# Altium PCB RGB_driver_AC.PcbDoc
Units mm, origin at the board's own origin, x right, y up, seen from the top; angles counter-clockwise.
Board outline 90.73 x 49.91 mm, 2 copper layers (Top Layer, Bottom Layer); 57 components, 39 nets, 162 pads, 7 vias.
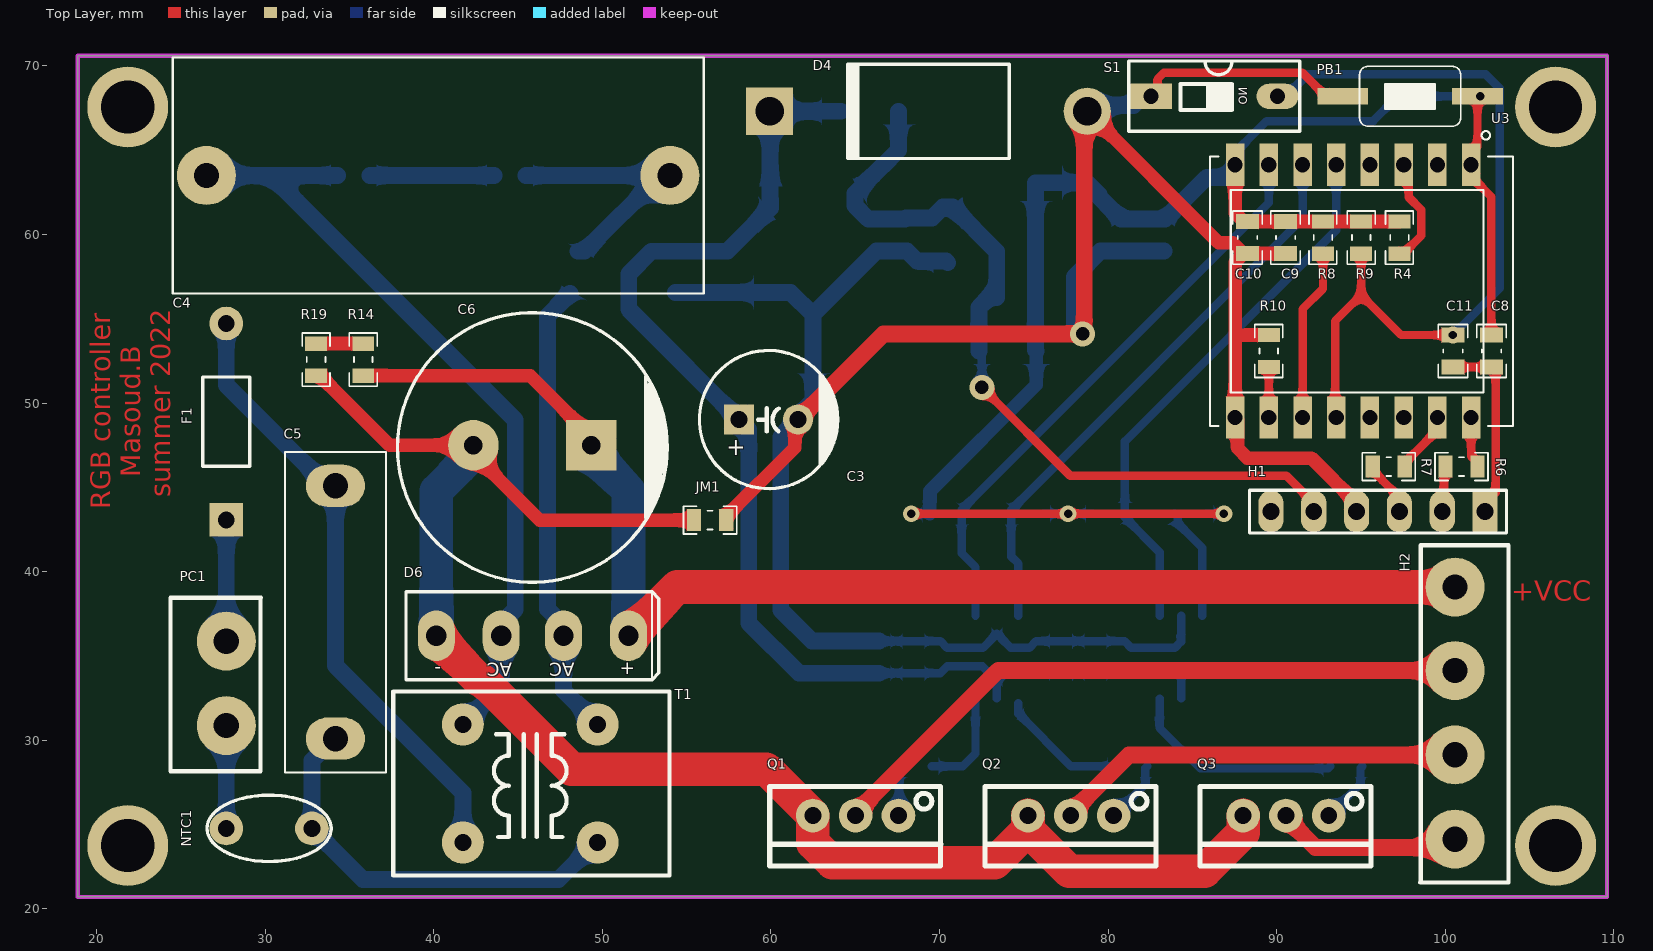
[diagram p0: Top Layer view]
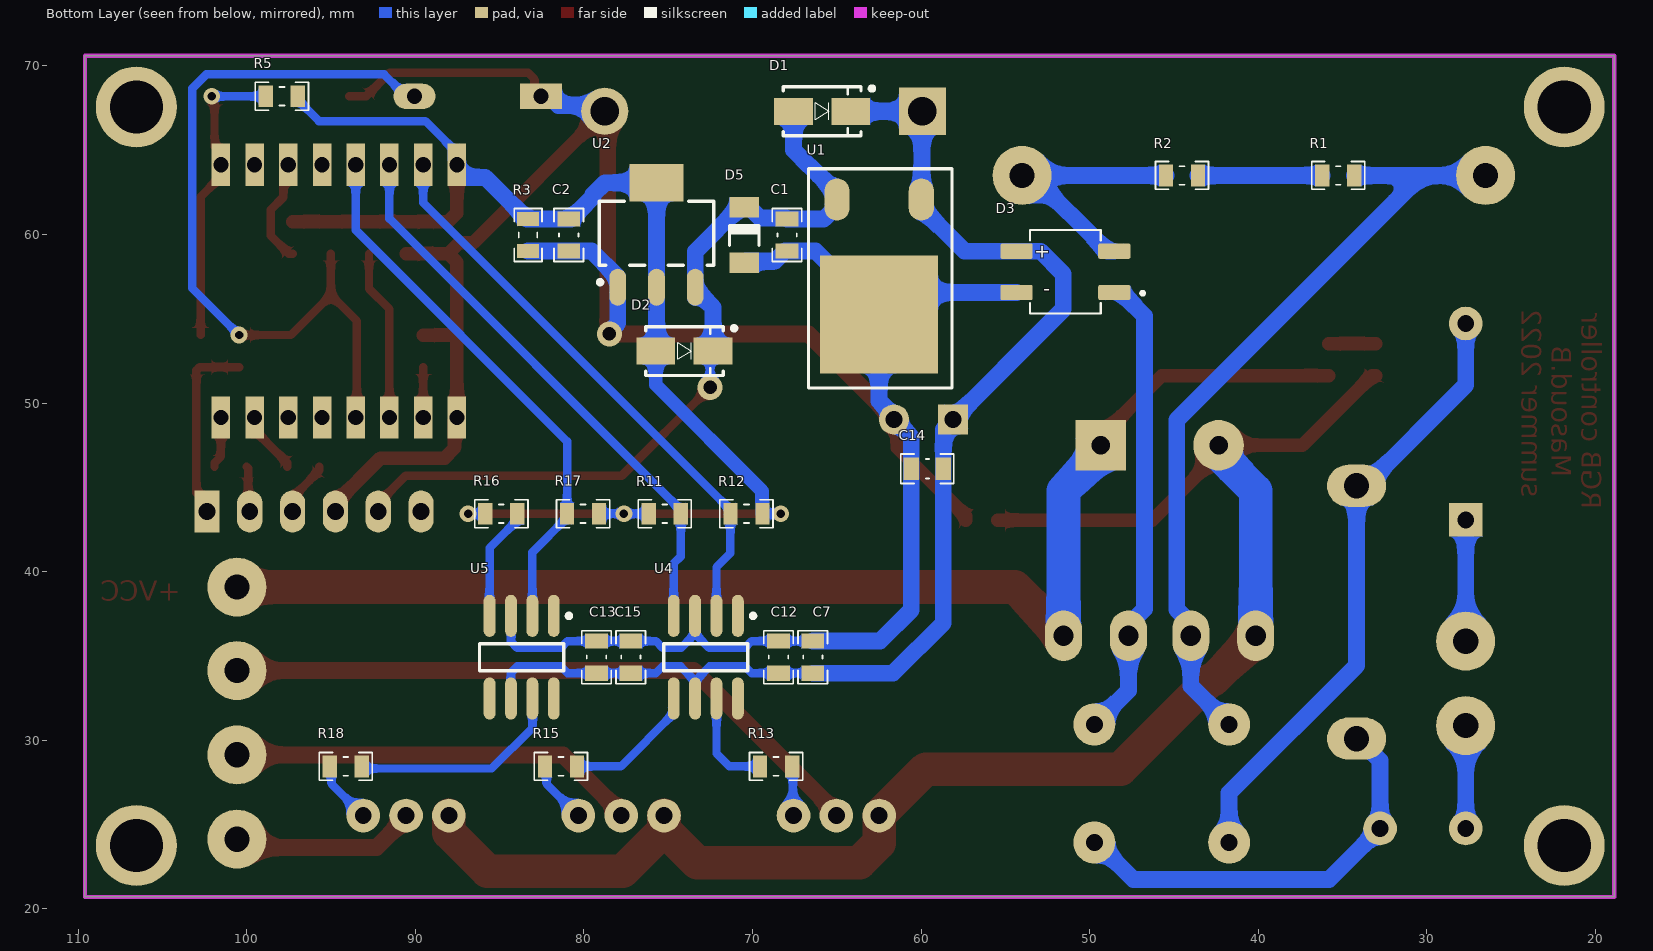
[diagram p1: Bottom Layer view, seen from below]
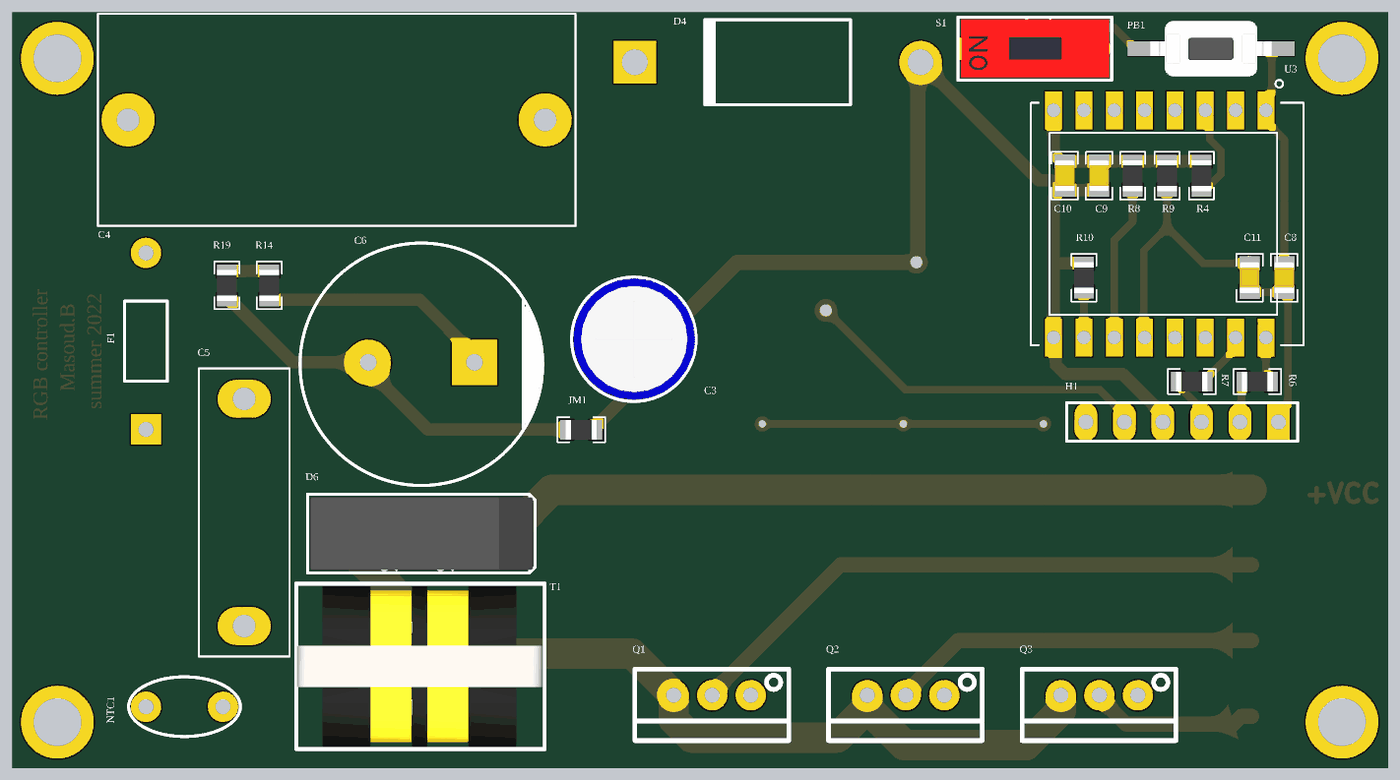
[diagram p2: 3D render of the assembled board from above, using the file's embedded part models]
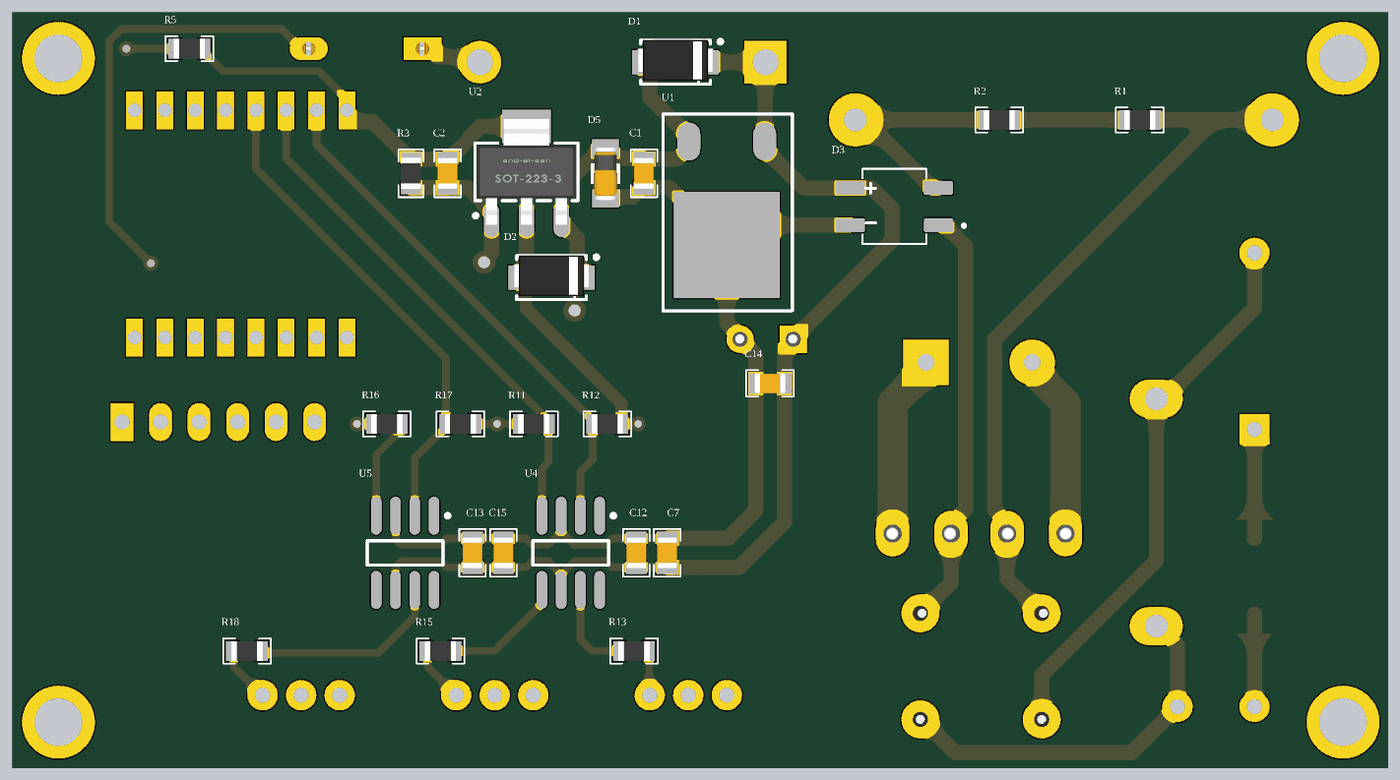
[diagram p3: 3D render of the assembled board from below, using the file's embedded part models]

## Layer stack, top to bottom
Top Solder: solder mask 0.0102, Solder Resist, Dk 3.5
Top Layer: signal copper 0.0356
Dielectric 1: dielectric 0.32, FR-4, Dk 4.8
Bottom Layer: signal copper 0.0356
Bottom Solder: solder mask 0.0102, Solder Resist, Dk 3.5

## Board outline
18.867,20.701 18.867,70.612 109.601,70.612 109.601,20.701

## Design rules (kind name [scope] priority, off if disabled: settings)
Clearance [All] p1: gap=0.4 ignorepadtopadclearanceinfootprint=TRUE except(0: Arc-Hole Track-Hole SMDPad-Hole THPad-Hole Via-Hole Fill-Hole Poly-Hole Region-Hole Text-Hole)
Height [All] p1 off: minheight=0 maxheight=25.4 prefheight=12.7
PolygonConnect [All] p1: connectstyle=Relief reliefconductorwidth=0.254 reliefentries=4 polygonreliefangle="90 Angle" airgapwidth=0.254
RoomDefinition power [InComponentClass('power')] p1 off: confinementstyle=ConfineIn formatcopy=TRUE lockcomponents=FALSE outline 178.943,71.247 345.186,71.247 345.186,93.853 178.943,93.853
RoomDefinition micro [InComponentClass('micro')] p2 off: confinementstyle=ConfineIn formatcopy=TRUE lockcomponents=FALSE outline 226.761,109.728 324.043,109.728 324.043,138.176 226.761,138.176
RoomDefinition driver [InComponentClass('driver')] p3 off: confinementstyle=ConfineIn formatcopy=TRUE lockcomponents=FALSE outline 210.124,38.1 303.088,38.1 303.088,51.435 210.124,51.435
RoutingVias [All] p1: holewidth=0.7 width=1.2 viastyle="Through Hole" minholewidth=0.5 minwidth=1 maxholewidth=1 maxwidth=1.5
SolderMaskExpansion [All] p1: expansion=0.102 istentingtop=FALSE
Width [All] p1: maxlimit=2 minlimit=0.3 preferedwidth=0.3
29 further rules are at their usual default settings.

## Classes and differential pairs
component class power: C1 C2 C3 C4 C5 C6 C14 D1 D2 D3 D4 D5 D6 F1 JM1 NTC1 PC1 R1 R2 R3 R14 R19 T1 U1 U2
component class micro: C8 C9 C10 C11 H1 PB1 R4 R5 R6 R7 R8 R9 R10 S1 U3
component class driver: C7 C12 C13 C15 H2 H-1 Q1 Q2 Q3 R11 R12 R13 R15 R16 R17 R18 U4 U5

## Components (designator, comment, footprint, x,y, rotation, side; value= is the part's Value field where it differs from the comment)
C1 "cap 10uF" CAP0805 67.945,59.971 r270 bottom value=10uF
C2 "cap 10uF" CAP0805 80.899,59.971 r270 bottom value=10uF
C3 "cap 47uF 25V" "Cap electrolitic radial 8x11.5-3.5" 58.105,49.022 r180 top value=47uF
C4 "cap 3.3uF" CAPRR2750W80L3150T1400H2450 40.259,63.5 r0 top value=3.3uF
C5 "cap 220nF" MKT-15mm 34.163,37.592 r90 top value=220nF
C6 "cap 47uF" Cap-Polar-16MM 45.847,47.371 r180 top value=47uF
C7 "cap 10uF" CAP0805 66.421,34.925 r90 bottom value=10uF
C8 "cap 100nF" CAP0805 102.743,53.086 r270 top value=100nF
C9 "cap 100nF" CAP0805 90.532,59.817 r90 top value=100nF
C10 "cap 1uF" CAP0805 88.265,59.817 r270 top value=1uF
C11 "cap 1uF" CAP0805 100.457,53.086 r270 top value=1uF
C12 "cap 10uF" CAP0805 68.453,34.925 r90 bottom value=10uF
C13 "cap 100nF" CAP0805 79.248,34.925 r90 bottom value=100nF
C14 "cap 100nF" CAP0805 59.629,46.101 r0 bottom value=100nF
C15 "cap 100nF" CAP0805 77.216,34.925 r90 bottom value=100nF
D1 "uf4007" DIOM4629X24N 65.864,67.31 r180 bottom
D2 "uf4007" DIOM4629X24N 74.041,53.086 r180 bottom
D3 "MB6S" SOIC245P670X270-4N 51.435,57.785 r0 bottom
D4 "12V" DO-201AD 69.342,67.31 r180 top
D5 "5.1V" "Diode 1n4148 SMD" 70.485,58.321 r90 bottom
D6 "KBP410" "Bridge KBP PACKAGE" 45.847,36.195 r180 top
F1 "1A" PIN-W2/E2.8 27.686,48.895 r90 top
H1 "H-1x6" H-1x6 95.885,43.561 r180 top
H2 "Phonix 4" "PHOENIX TERMINAL R 4" 120.523,21.557 r90 top
JM1 "Short Jumper" RES0805 56.388,43.053 r0 top
NTC1 "NTC 10d9" CAPNTO5.08-7.37x3.94 30.226,24.765 r180 top
PB1 "Push-Button-tall" tack-sw-3x5x6 97.917,68.199 r0 top
PC1 "Power Connector" "phoenix terminal R 2" 7.747,38.443 r270 top
Q1 "FQPF2N60C" TO-220 65.024,25.527 r180 top
Q2 "FQPF2N60C" TO-220 77.787,25.527 r180 top
Q3 "FQPF2N60C" TO-220 90.551,25.527 r180 top
R1 "Res 330k" RES0805 35.254,63.5 r0 bottom value=330k
R2 "Res 330k" RES0805 44.518,63.5 r0 bottom value=330k
R3 "Res 330R" RES0805 83.312,59.971 r90 bottom value=330R
R4 "Res 10K" RES0805 97.282,59.817 r90 top value=10K
R5 "Res 10K" RES0805 97.917,68.199 r180 bottom value=10K
R6 "Res 10R" RES0805 100.965,46.228 r180 top value=10R
R7 "Res 10R" RES0805 96.647,46.228 r0 top value=10R
R8 "Res 10K" RES0805 92.748,59.817 r270 top value=10K
R9 "Res 10K" RES0805 95.015,59.817 r270 top value=10K
R10 "Res 10K" RES0805 89.535,53.086 r270 top value=10K
R11 "Res 10K" RES0805 75.204,43.434 r0 bottom value=10K
R12 "Res 10K" RES0805 70.358,43.434 r0 bottom value=10K
R13 "Res 10R" RES0805 68.599,28.448 r0 bottom value=10R
R14 "Res 330k" RES0805 35.814,52.578 r270 top value=330k
R15 "Res 10R" RES0805 81.362,28.448 r180 bottom value=10R
R16 "Res 10K" RES0805 84.897,43.434 r0 bottom value=10K
R17 "Res 10K" RES0805 80.051,43.434 r180 bottom value=10K
R18 "Res 10R" RES0805 94.126,28.448 r180 bottom value=10R
R19 "Res 330k" RES0805 33.02,52.578 r90 top value=330k
S1 "DS1" "DIP Switch x1" 82.55,68.199 r270 top
T1 "UUD9-EMI filter" UUD9.8 45.72,27.432 r180 top
U1 "L7805CV" REG-7805-smd 62.484,62.07 r0 bottom
U2 "AMS1117-3.3" SOT223 75.692,60.071 r90 bottom
U3 "ESP8266-12E/ESP-12E" ESP8266-12E-THT 101.536,64.135 r270 top locked
U4 "7667" SO8_M 72.771,34.925 r270 bottom
U5 "7667" SO8_M 83.693,34.925 r270 bottom

## Footprints (in the part's own frame and the unit in brackets; to place one, negate y for a bottom-side part, rotate by r counter-clockwise, add the part's x,y. Pads: shape width x height; smd on the part's side, far side on the other; paste and mask are expansions set on the pad)
"Bridge KBP PACKAGE" [mm] "KBP Bridge Rectifiers DESIGNER :ABBAS BASEREH"
  oval 2.2x3 hole 1.2: 1(-5.7,0) 2(-1.85,0) 3(1.85,0) 4(5.7,0)
  silkscreen extent -7.5,-2.6 7.5,2.6, body extent -7.38,-2.42 7.35,2.41, height 12.49
CAP0805 [mm] "Chip Capacitor, 2-Leads, Body 2/00x1/25mm, IPC Medium Density DESIGNER:ABBAS BASEREH"
  rect 0.9x1.35 smd: 1(-0.95,0) 2(0.95,0)
  silkscreen extent -1.58,-0.87 1.58,0.87, body extent -1.02,-0.65 1.02,0.65, height 0.5
"Cap electrolitic radial 8x11.5-3.5" [mm] "Cap electrolitic radial 8x11.5-3.5-Design:Ali Hafizi"
  rect 1.8x1.8 hole 1: 1(0,0)
  round 1.8 hole 1: 2(-3.5,0)
  silkscreen extent -5.85,-4.1 2.35,4.1, body extent -5.8,-4.04 2.25,4.01, height 12.03
Cap-Polar-16MM [mm]
  rect 3x3 hole 1.1: 1(-3.5,-0.127)
  round 3 hole 1.1: 2(3.5,-0.127)
  silkscreen extent -8,-8 8,8
CAPNTO5.08-7.37x3.94 [mm] "Capacitor, Radial, Tantalum, Non-Polarised; Body 7.37 x 3.94 x 6.86 mm (WxTxH max); Pin Spacing 5.08 mm (typ)"
  round 2 hole 1: 1(-2.54,0) 2(2.54,0)
  silkscreen extent -3.68,-1.98 3.68,1.96
CAPRR2750W80L3150T1400H2450 [mm]
  round 3.5 hole 1.5: 1(-13.75,0) 2(13.75,0)
  silkscreen extent -15.75,-7 15.75,7
"Diode 1n4148 SMD" [mm] "Mini MELF SOD-80"
  rect 1.2x1.75 smd: 1(0,0) 2(3.3,0)
  silkscreen extent 1.04,-0.87 2.22,0.88, body extent -0.13,-0.75 3.37,0.75, height 1.55
DIOM4629X24N [mm] "Molded Diode, 2-Leads, Body 4/60x2/90mm, IPC Medium Density-Design:Abbas Basereh"
  rect 2.3x1.6 smd: 1(-1.7,0) 2(1.7,0)
  silkscreen extent -2.3,-1.45 3.07,1.47, body extent -2.5,-1.22 2.5,1.48, height 2.2
"DIP Switch x1" [mm] "Switch DIP 1 way flat slide Thru-Hole-Design:Ali Hafizi"
  rect 1.5x2.5 hole 0.9: 1(0,0)
  oval 1.5x2.5 hole 0.9: 2(0,7.5)
  silkscreen extent -2.09,-1.32 2.08,8.82, body extent -1.94,-1.11 1.89,8.64, height 7.33
DO-201AD [mm] "Diode, Axial; Body 9.5 x 5.6 mm (LxDia. max), Lead Dia. 1.32 mm (max)"
  round 2.8 hole 1.7: 1(-9.42,0)
  rect 2.8x2.8 hole 1.7: 2(9.42,0)
  silkscreen extent -4.8,-2.8 4.9,2.8
ESP8266-12E-THT [mm]
  rect 2.5x1.1 hole 0.9: 1(0,0) 2(0,-2) 3(0,-4) 4(0,-6) 5(0,-8) 6(0,-10) 7(0,-12) 8(0,-14) 15(15,-14) 16(15,-12) 17(15,-10) 18(15,-8) 19(15,-6) 20(15,-4) 21(15,-2) 22(15,0)
  Top Layer pour cut-out: -0.5,8.5 15.5,8.5 15.5,-15.5 -0.5,-15.5
  Bottom Layer pour cut-out: -0.5,8.5 15.5,8.5 15.5,-15.5 -0.5,-15.5
  silkscreen extent -2,-15.5 15.5,2.48, body extent -1.27,-15.5 16.26,8.5, height 5
H-1x6 [mm]
  rect 1.5x2.5 hole 1: 1(-6.477,0)
  oval 1.5x2.5 hole 1: 2(-3.937,0) 3(-1.397,0) 4(1.143,0) 5(3.683,0) 6(6.223,0)
  silkscreen extent -7.75,-1.27 7.49,1.27
MKT-15mm [mm]
  oval 2.5x3.5 hole 1.5: 1(-7.5,0) 2(7.5,0)
  silkscreen extent -9.5,-3 9.5,3
"phoenix terminal R 2" [mm] "2 Right terminals"
  round 3.5 hole 1.5: 1(2.573,19.939) 2(7.573,19.939)
  silkscreen extent 0,16.64 10.29,22
"PHOENIX TERMINAL R 4" [mm] "4 Right terminals"
  round 3.5 hole 1.5: 1(2.573,19.939) 2(7.573,19.939) 3(12.573,19.939) 4(17.526,19.939)
  silkscreen extent 0,16.76 20,22
PIN-W2/E2.8 [mm] "Thru-Hole; 2 Leads"
  rect 2x2 hole 1: 1(-5.825,0)
  round 2 hole 1: 2(5.825,0)
  silkscreen extent -2.65,-1.4 2.65,1.4
REG-7805-smd [mm]
  oval 1.5x2.5 smd: 1(-2.5,0) 3(2.5,0)
  rect 7x7 smd: 2(0,6.825)
  silkscreen extent -4.32,-1.82 4.19,11.18
RES0805 [mm] "Chip Resistor, 2-Leads, Body 2/00x1/25mm, IPC Medium Density DESIGNER:ABBAS BASEREH"
  rect 0.85x1.3 smd: 1(-0.95,0) 2(0.95,0)
  silkscreen extent -1.58,-0.82 1.58,0.82, body extent -1.02,-0.65 1.02,0.65, height 0.5
SO8_M [mm] "SOIC, 8-Leads, Body 4.9x3.9mm, Pitch 1.27mm, IPC Low Density"
  oval 2.5x0.7 smd: 1(-2.45,1.905) 2(-2.45,0.635) 3(-2.45,-0.635) 4(-2.45,-1.905) 5(2.45,-1.905) 6(2.45,-0.635) 7(2.45,0.635) 8(2.45,1.905)
  silkscreen extent -2.57,-2.5 0.8,2.93, body extent -2,-2.5 2,2.5, height 1.75
SOIC245P670X270-4N [mm]
  rrect23% 1.91x0.91 smd: 1(-2.9,1.225) 2(-2.9,-1.225) 3(2.9,-1.225) 4(2.9,1.225)
  silkscreen extent -4.68,-2.48 2.1,2.48
SOT223 [mm] "SOT223, 4-Leads, Body 6.5x3.5mm, Pitch 2.30mm-Designer Abbas Basereh"
  oval 2.2x1 smd: 1(-3.2,2.3) 2(-3.2,0) 3(-3.2,-2.3)
  rect 2.2x3.2 smd: 4(3,0)
  Top Layer pour cut-out: -1.7,3.556 1.7,3.556 1.7,-3.556 -1.7,-3.556
  silkscreen extent -3.02,-3.4 1.9,3.48, body extent -3.5,-3.25 3.5,3.25, height 1.7
tack-sw-3x5x6 [mm]
  rect 3x1 smd mask+0.05: 1(-4,0) 2(4,0)
  silkscreen extent -3,-1.78 3,1.78, body extent -4,-1.75 4,1.75, height 4.3
TO-220 [mm]
  round 2 hole 1: 1(-2.54,0) 2(0,0) 3(2.54,0)
  silkscreen extent -5.05,-1.72 5.1,3, body extent -5.05,-1.72 5.1,3, height 15.87
UUD9.8 [mm] "Line filter"
  round 2.5 hole 1: 1(-4,3.5) 2(-4,-3.5) 3(4,3.5) 4(4,-3.5)
  silkscreen extent -8.25,-5.46 8.13,5.46, body extent -8.08,-5.3 8.08,5.3, height 15.3

## Part data
C1 C2 C7 C12: library part "Cap Pol1", "CAP seramic", LatestRevisionDate=17-Jul-2002, LatestRevisionNote="Re-released for DXP Platform.", PackageDescription="Polarized Capacitor (Radial); 2 Leads", PackageReference=RB7.6-15, Published=8-Jun-2000, Publisher="Altium Limited"
C3: library part "Cap Pol1", "Polarized Capacitor (Radial)", LatestRevisionDate=17-Jul-2002, LatestRevisionNote="Re-released for DXP Platform.", PackageDescription="Polarized Capacitor (Radial); 2 Leads", PackageReference=RB7.6-15, Published=8-Jun-2000, Publisher="Altium Limited"
C4 C5: library part Cap, "Cap MKT 275V", LatestRevisionDate=17-Jul-2002, LatestRevisionNote="Re-released for DXP Platform.", PackageDescription="Radial Cap, Thru-Hole; 2 Leads; 0.3 in Pin Spacing", PackageReference=RAD-0.3, Published=8-Jun-2000, Publisher="Altium Limited"
C6: library part "Cap Pol1", "Polarized Capacitor (Radial) 400V", LatestRevisionDate=17-Jul-2002, LatestRevisionNote="Re-released for DXP Platform.", PackageDescription="Polarized Capacitor (Radial); 2 Leads", PackageReference=RB7.6-15, Published=8-Jun-2000, Publisher="Altium Limited"
C8 C9 C10 C11 C13 C14 C15: library part "Cap ceramic", "CAP seramic"
D1 D2: library part "1n4007 SMD M7", "Standard Rectifiers", Manufacturer="DC COMPONENTS", Data=16-12-2016, Designer="Abbas Basereh", Link=http://www.tme.eu/en/details/m7/smd-universal-diodes/dc-components/, Part. No=M7
D3 D6: library part "Diode Bridge", "Diode Bridge", Company=E.P.I.L, Design Date=2011/11/02
D4: library part "D Zener", "1N5349", LatestRevisionDate=17-Jul-2002, LatestRevisionNote="Re-released for DXP Platform.", PackageDescription="Diode, Thru-Hole; 2 Leads; 0.7 in Pin Spacing", PackageReference=DIODE-0.7, Published=8-Jun-2000, Publisher="Altium Limited"
D5: library part "D Zener", "Zener Diode", LatestRevisionDate=17-Jul-2002, LatestRevisionNote="Re-released for DXP Platform.", PackageDescription="Diode, Thru-Hole; 2 Leads; 0.7 in Pin Spacing", PackageReference=DIODE-0.7, Published=8-Jun-2000, Publisher="Altium Limited"
F1: library part "Fuse 2", "Fuse", LatestRevisionDate=17-Jul-2002, LatestRevisionNote="Re-released for DXP Platform.", PackageDescription="Thru-Hole; 2 Leads", PackageReference=PIN-W2/E2.8, Published=8-Jun-2000, Publisher="Altium Limited"
H1: "Bluetooth module HC05"
H2: library part "Header 4", "Header, 4-Pin", LatestRevisionDate=17-Jul-2002, LatestRevisionNote="Re-released for DXP Platform.", Publisher="Altium Limited"
JM1: library part "Solder Jumper", "short circuit"
NTC1: library part "Res Thermal", "NTC", Code_IPC=RESC2012, LatestRevisionDate=29-May-2009, LatestRevisionNote="IPC-7351 Footprint Added.", PackageDescription="Chip Resistor 0805 Case Size", PackageReference=6-0805, PackageVersion=Mar-2003, Published=24-Mar-1999, Publisher="Altium Limited"
PC1: "white Power Connector"
Q1 Q2 Q3: library part MOSFET-N, "N-Channel MOSFET", LatestRevisionDate=17-Jul-2002, LatestRevisionNote="Re-released for DXP Platform.", PackageDescription="TO, Flat Index; 3 In-Line, Axial Leads; Body Dia. 4.6mm; Lead Dia. 0.5 mm (max)", PackageReference=E3, PackageVersion=1995/1996, Published=8-Jun-2000, Publisher="Altium Limited"
R1 R2 R3 R4 R5 R6 R7 R8 R9 R10 R11 R12 R13 R14 R15 R16 R17 R18 R19: library part Res1, "Resistor", LatestRevisionDate=17-Jul-2002, LatestRevisionNote="Re-released for DXP Platform.", PackageDescription="Axial Device, Thru-Hole; 2 Leads; 0.3 in Pin Spacing", PackageReference=AXIAL-0.3, Published=8-Jun-2000, Publisher="Altium Limited"
S1: library part "DIP Switch 1", "1 BIT DIP Switch"
T1: library part "Trans Cupl", "Line filter", LatestRevisionDate=17-Jul-2002, LatestRevisionNote="Re-released for DXP Platform.", PackageDescription="Transformer; 4 Leads", PackageReference=TRF_4, Published=8-Jun-2000, Publisher="Altium Limited"
U1: library part "L7805CV-Linear Voltage Regulator IC Positive 1 Output 5V 1.5A TO-220AB", "Linear Voltage Regulator IC Positive FIXED", Manufacturer=STMicroelectronics, Designer="Abbas Basereh", Link=https://www.aliexpress.com/item/, Part. No=L7805CV
U2: library part AMS1117-x.x, "x.x Volt, 800mA Low-Dropout Linear Regulator, 4-pin SOT-223", Data=16-12-2016, Designer="Ali Hafizi"
U3: "None", Availability=Unavailable, MP=ESP8266-12E/ESP-12E, Package=None, Price=None
U4 U5: library part ICL7667, "Gate driver"

## Free pads (board coordinates)
  round 4.8 hole 3.15: S1(21.844,67.564) S2(21.844,23.749) S3(106.553,23.749) S4(106.553,67.564)

## Via types
v1: diameter 1, hole 0.5, Top Layer to Bottom Layer, tented both sides, 5 vias
v2: diameter 1.5, hole 0.8, Top Layer to Bottom Layer, tented both sides, 2 vias

## Nets (pads, with @x,y where several pads share a name; then routed paths per layer and width w, separated by ;. In a path a pad name is that pad's centre, name@x,y a point inside that pad or via, vN(x,y) a via of type N, cw(c..) or ccw(c..) an arc to the next point about the centre after c; other vN are vias at no path point)
+3v3: C2.1 C9.2 C10.1 D2.1 R3.2 R4.2 R5.2 R8.1 R9.1 R11.2 R12.1 R16.2 R17.2 U2.2 U2.4 U3.8 | length 87.2
  Top Layer w0.5: v1(68.326,43.434) v1(77.628,43.434) v1(86.868,43.434) ; R8.1@92.856,60.767 R9.1 R9.1@95.123,60.767
  Top Layer w0.8: U3.8 87.536,61.271 88.04,60.767 C10.1 C9.2 R4.2
  Bottom Layer w0.5: v1(68.326,43.434) R12.1 ; R11.2 v1(77.628,43.434) R17.2 ; R16.2 v1(86.868,43.434) ; U3.8 87.836,64.435 87.836,65.154 89.408,66.727 95.72,66.727 96.967,67.974 R5.2
  Bottom Layer w0.8: R12.1 69.433,43.459 69.433,44.778 75.741,51.086 D2.1
  Bottom Layer w1: D2.1 75.692,53.135 U2.2 U2.4 78.749,63.071 79.456,62.364 79.456,62.239 80.774,60.921 C2.1 R3.2 83.387,60.921 85.851,63.385 87.486,63.385 87.536,63.435 U3.8
+5: C1.1 D1.1 D2.2 D5.2 H1.5 U1.3 U2.3 | length 48.7
  Top Layer w0.5: v2(72.517,50.927) 77.758,45.686 90.577,45.686 92.202,44.061 H1.5
  Bottom Layer w0.5: D2.2 72.517,52.91 v2(72.517,50.927)
  Bottom Layer w1: D1.1 67.564,65.01 66.634,64.08 66.629,64.08 64.984,62.435 U1.3 64.984,61.705 65.768,60.921 C1.1 67.995,60.971 69.56,60.971 70.21,61.621 D5.2 70.76,61.621 73.392,58.989 U2.3 73.392,56.271 72.927,56.271 72.341,55.685 D2.2
+12: C3.1 C7.1 C12.1 C13.1 C14.1 C15.1 D1.2 D3.3 D4.2 U1.1 U4.6 U5.6 | length 74.5
  Bottom Layer w0.5: C7.1 C12.1 70.052,33.975 70.452,34.375 72.55,34.375 73.406,33.519 U4.6 ; U4.6@73.444,33.557 74.262,34.375 75.326,34.375 75.726,33.975 C15.1 C13.1 80.974,33.975 81.374,34.375 83.952,34.375 84.328,33.999 U5.6
  Bottom Layer w1: D1.2 D4.2 59.953,67.279 59.953,62.101 U1.1 59.984,61.57 57.424,59.01 D3.3 52.914,59.01 51.562,57.658 51.562,55.565 58.679,48.448 58.679,36.952 61.656,33.975 C7.1
+300V_DC: C6.1 D6.1 H2.4 R14.2 | length 78.2
  Top Layer w0.8: R14.2 45.717,51.628 49.347,47.998 C6.1
  Top Layer w2: D6.1 51.547,36.541 51.639,36.633 51.985,36.633 54.435,39.083 H2.4
  Bottom Layer w1: C6.1@49.347,46.998 C6.1
  Bottom Layer w2: C6.1@49.347,46.998 51.547,44.798 D6.1
BLUE: H2.2 Q2.2 | length 24.4
  Top Layer w1: Q2.2 77.787,25.674 81.243,29.13 H2.2
Bluetooth_state: C8.2 C11.2 H1.1 | length 11.3
  Top Layer w0.5: C11.2 C8.2 102.79,52.136 102.99,51.936 102.99,44.689 102.362,44.061 H1.1
En: H1.6
Gate1: Q1.1 R13.1 | length 3
  Bottom Layer w0.5: Q1.1 67.606,25.569 67.606,28.406 R13.1
Gate2: Q2.1 R15.1 | length 3.7
  Bottom Layer w0.5: Q2.1 82.213,27.412 82.213,28.348 R15.1
Gate3: Q3.1 R18.1 | length 3.7
  Bottom Layer w0.5: Q3.1 94.976,27.412 94.976,28.348 R18.1
GND: C1.2 C2.2 C3.2 C7.2 C9.1 C10.2 C12.2 C13.2 C14.2 C15.2 D3.4 D4.1 D5.1 H1.4 JM1.2 PB1.1 R3.1 R10.1 S1.1 U1.2 U2.1 U3.15 U4.3 U5.3 | length 168.9
  Top Layer w0.5: S1.1 82.931,68.58 82.931,69.215 83.315,69.599 91.517,69.599 92.917,68.199 PB1.1
  Top Layer w0.8: JM1.2 57.338,43.278 61.414,47.354 61.414,48.831 C3.2 ; D4.1 86.555,59.517 87.39,59.517 C10.2@88.04,58.867 ; R10.1 87.597,54.036 87.536,53.975 ; C9.1 C10.2 C10.2@88.04,58.867 ; H1.4 94.742,44.061 92.067,46.736 88.265,46.736 87.686,47.315 87.686,48.985 U3.15 87.536,53.975 ; 87.536,53.975 87.536,58.363 C10.2@88.04,58.867
  Top Layer w1: C3.2 66.685,54.102 v2(78.486,54.102) 78.582,54.198 78.582,67.13 D4.1
  Bottom Layer w0.5: C7.2 C12.2 70.052,35.875 70.452,35.475 72.575,35.475 73.406,36.306 74.237,35.475 75.326,35.475 75.726,35.875 C15.2 C13.2 80.974,35.875 81.374,35.475 83.952,35.475 84.328,35.851 U5.3
  Bottom Layer w1: D3.4 61.169,56.56 U1.2 ; C7.2 62.423,35.875 60.579,37.719 C14.2 60.579,47.996 C3.2 61.605,49.238 62.484,50.117 U1.2 ; D5.1 70.385,58.421 68.67,58.421 68.07,59.021 C1.2 66.26,59.021 U1.2 ; v2(78.486,54.102) 78.486,54.237 77.992,54.731 U2.1 77.992,57.471 79.542,59.021 R3.1 ; D4.1 79.106,67.654 81.505,67.654 82.05,68.199 S1.1
GNDP: C6.2 D6.4 JM1.1 Q1.3 Q2.3 Q3.3 R19.1 | length 97.7
  Top Layer w0.8: R19.1 33.245,51.628 37.375,47.498 C6.2 42.347,46.998 46.292,43.053 JM1.1
  Top Layer w2: D6.4 40.147,35.849 40.239,35.757 40.5,35.757 42.674,33.582 42.818,33.582 43.105,33.295 43.159,33.295 48.172,28.282 59.729,28.282 Q1.3 62.484,23.905 63.656,22.733 73.279,22.733 Q2.3@75.248,24.701 ; Q2.3 75.248,24.673 77.692,22.228 85.728,22.228 88.011,24.511 Q3.3
  Bottom Layer w1: C6.2@42.347,46.998 C6.2
  Bottom Layer w2: D6.4 40.147,44.798 C6.2@42.347,46.998
GREEN: H2.1 Q3.2 | length 11.1
  Top Layer w1: Q3.2 90.551,25.38 92.304,23.627 99.405,23.627 99.908,24.13 H2.1
IO0: C11.1 R9.2 S1.2 U3.18 | length 46.7
  Top Layer w0.5: U3.18 93.472,49.199 93.472,54.864 95.015,56.407 ; R9.2 95.015,56.407 ; v1(100.457,54.036) 97.386,54.036 95.015,56.407
  Bottom Layer w0.5: S1.2 90.55,68.199 91.85,69.499 102.402,69.499 103.226,68.675 103.226,56.805 v1(100.457,54.036)
IO2: R8.2 U3.17 | length 10.2
  Top Layer w0.5: U3.17 91.536,55.568 92.748,56.781 R8.2
IO15: R10.2 U3.16 | length 3
  Top Layer w0.5: U3.16@89.536,49.135 R10.2
main_AC1: C4.1 D6.3 R1.1 T1.4 | length 47.7
  Bottom Layer w1: C4.1 30.326,63.5 ; R1.1 30.326,63.5 ; T1.4 43.997,33.209 43.997,36.92 44.831,37.754 44.831,48.995 30.326,63.5
main_AC2: D3.1 D6.2 T1.2 | length 27.4
  Bottom Layer w1: D3.1@48.08,56.515 46.736,55.171 46.736,37.781 47.697,36.82 47.697,32.955 T1.2
NetC4_2: C4.2 D3.2 R2.2 | length 15.3
  Bottom Layer w1: R2.2 C4.2@53.435,63.5 ; D3.2 48.945,59.01 C4.2@53.435,63.5 ; C4.2 C4.2@53.435,63.5
NetC5_1: C5.1 NTC1.1 T1.1 | length 25.1
  Bottom Layer w1: C5.1 34.069,30.092 32.766,28.789 NTC1.1 35.803,21.728 47.389,21.728 T1.1@49.72,24.059
NetC5_2: C5.2 F1.2 T1.3 | length 36.9
  Bottom Layer w1: F1.2 27.686,51.069 33.663,45.092 C5.2 34.163,34.417 41.72,26.86 T1.3
NetF1_1: F1.1 PC1.1 | length 7.2
  Bottom Layer w1: PC1.1 F1.1
NetNTC1_2: NTC1.2 PC1.2 | length 6.1
  Bottom Layer w1: NTC1.2 PC1.2
NetR1_2: R1.2 R2.1 | length 7.4
  Bottom Layer w1: R1.2 R2.1
NetR4_1: R4.1 U3.3 | length 6.4
  Top Layer w0.5: R4.1 97.507,58.867 98.582,59.942 98.582,61.461 97.836,62.207 97.836,63.835 U3.3
NetR13_2: R13.2 U4.7 | length 6.2
  Bottom Layer w0.5: R13.2 71.374,28.448 72.136,29.21 U4.7
NetR14_1: R14.1 R19.2 | length 2.8
  Top Layer w0.8: R19.2 R14.1
NetR15_2: R15.2 U4.5 | length 7.9
  Bottom Layer w0.5: U4.5@74.676,32.196 74.676,31.575 77.803,28.448 R15.2 R15.2@80.413,28.223
NetR16_1: R16.1 U5.4 | length 6.7
  Bottom Layer w0.5: R16.1 84.122,43.259 84.122,42.878 85.598,41.402 U5.4
NetR18_2: R18.2 U5.7 | length 12.9
  Bottom Layer w0.5: U5.7 83.058,30.734 85.471,28.321 93.049,28.321 R18.2
PWM_B: R11.1 U3.6 U4.4 | length 34.1
  Bottom Layer w0.5: U4.4 74.676,40.471 74.254,40.892 R11.1 74.254,43.659 91.536,60.941 U3.6
PWM_G: R17.1 U3.5 U5.2 | length 32.8
  Bottom Layer w0.5: U5.2 83.058,41.152 81.001,43.209 R17.1 81.001,47.727 93.536,60.262 U3.5
PWM_R: R12.2 U3.7 U4.2 | length 34.7
  Bottom Layer w0.5: U4.2 72.136,40.268 71.308,41.096 R12.2 71.308,43.659 89.536,61.887 U3.7
RED: H2.3 Q1.2 | length 39.2
  Top Layer w1: Q1.2 65.024,25.674 73.48,34.13 H2.3
RST: C8.1 PB1.2 R5.1 U3.1 | length 18.2
  Top Layer w0.5: v1(102.076,68.199) PB1.2 101.917,65.216 101.536,64.835 U3.1 101.536,63.435 102.743,62.228 C8.1
  Bottom Layer w0.5: R5.1 v1(102.076,68.199)
RX: R7.2 U3.21 | length 3.7
  Top Layer w0.5: R7.2 97.597,46.453 99.236,48.092 99.236,48.835 U3.21
RX_b: H1.2 R6.2 | length 2.7
  Top Layer w0.5: H1.2 99.918,43.657 99.918,46.131 R6.2
TX: R6.1 U3.22 | length 3.1
  Top Layer w0.5: U3.22 101.536,46.832 101.915,46.453 R6.1
TX_b: H1.3 R7.1 | length 3.3
  Top Layer w0.5: R7.1 95.697,46.003 97.091,44.609 97.091,43.752 H1.3
pads on no net: U3.2 U3.4 U3.19 U3.20 U4.1 U4.8 U5.1 U5.5 U5.8

## Keep-outs
Keep-Out Layer:
  the board outline again, w0.254

## Other copper
Top Layer:
  text "Masoud.B" at 22.963,45.595 h2 r90
  text "summer 2022" at 24.741,44.41 h2 r90
  text "RGB controller" at 21.181,43.688 h2 r90
  text "+VCC" at 103.932,38.273 h1.2

## Text inside footprints (layer, text, board x,y; h text height)
C3: Top Overlay "+" at 58.495,47.802 h1 r180
D3: Bottom Overlay "+" at 52.324,59.309 h0.81 r180; Bottom Overlay "-" at 52.324,57.023 h0.81 r180
D6: Top Overlay "AC" at 48.347,34.595 h0.8 r180; Top Overlay "AC" at 44.647,34.595 h0.8 r180; Top Overlay "-" at 40.447,34.595 h0.8 r180; Top Overlay "+" at 51.947,34.595 h0.8 r180
S1: Top Overlay "ON" at 87.75,67.699 h0.5 r270